# Allegro board MotorControlBoard.brd
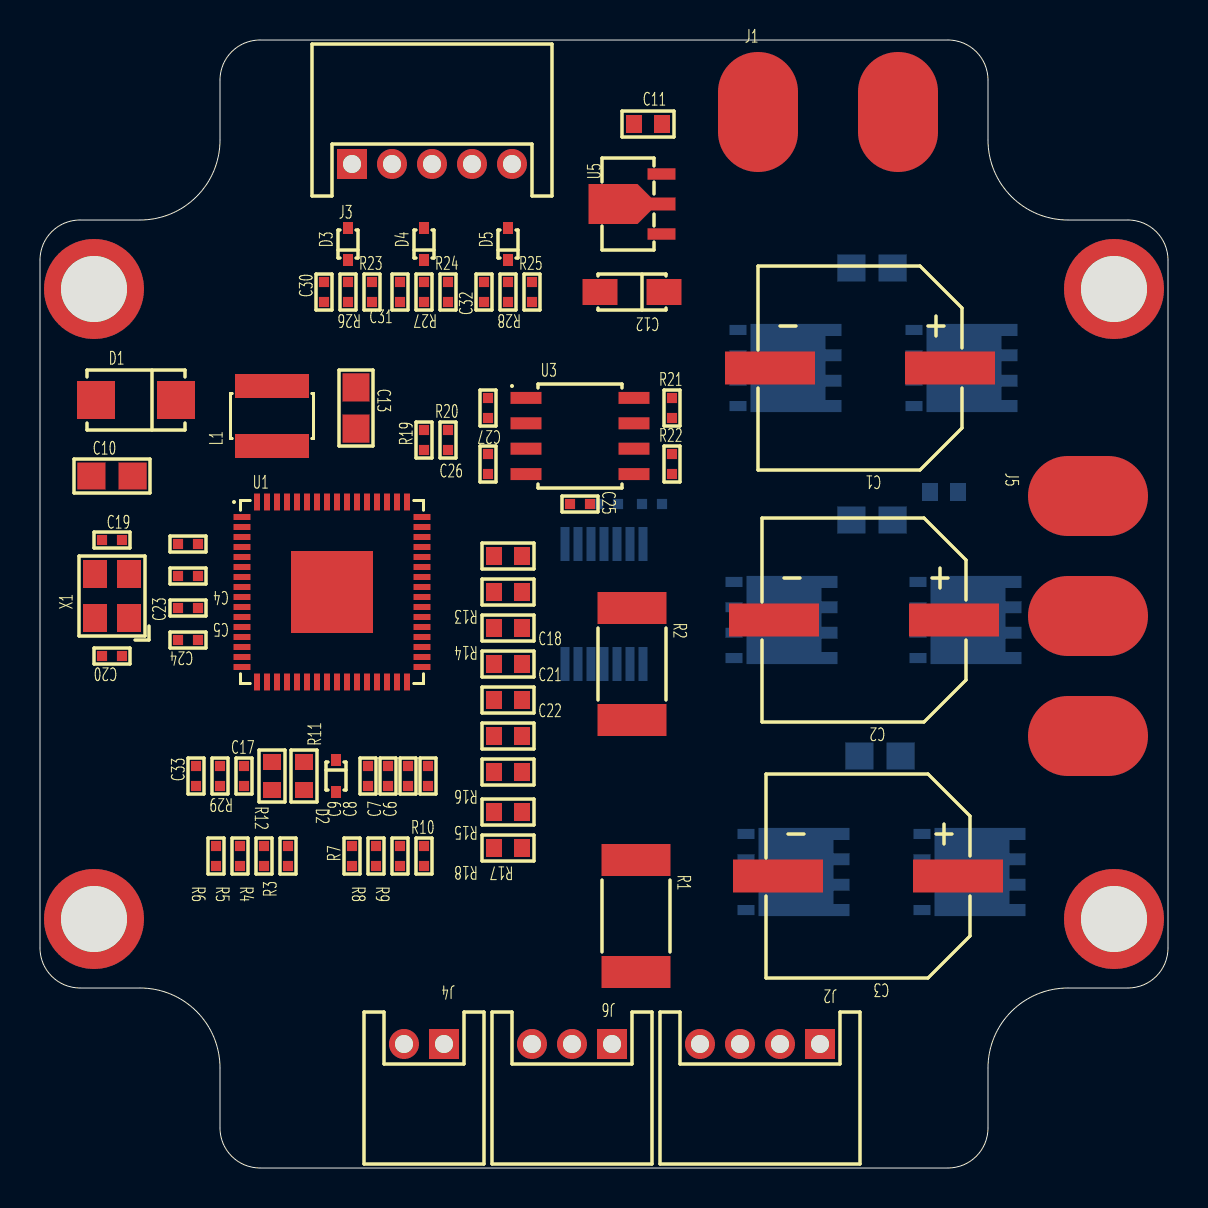
[diagram p0: board, top side]
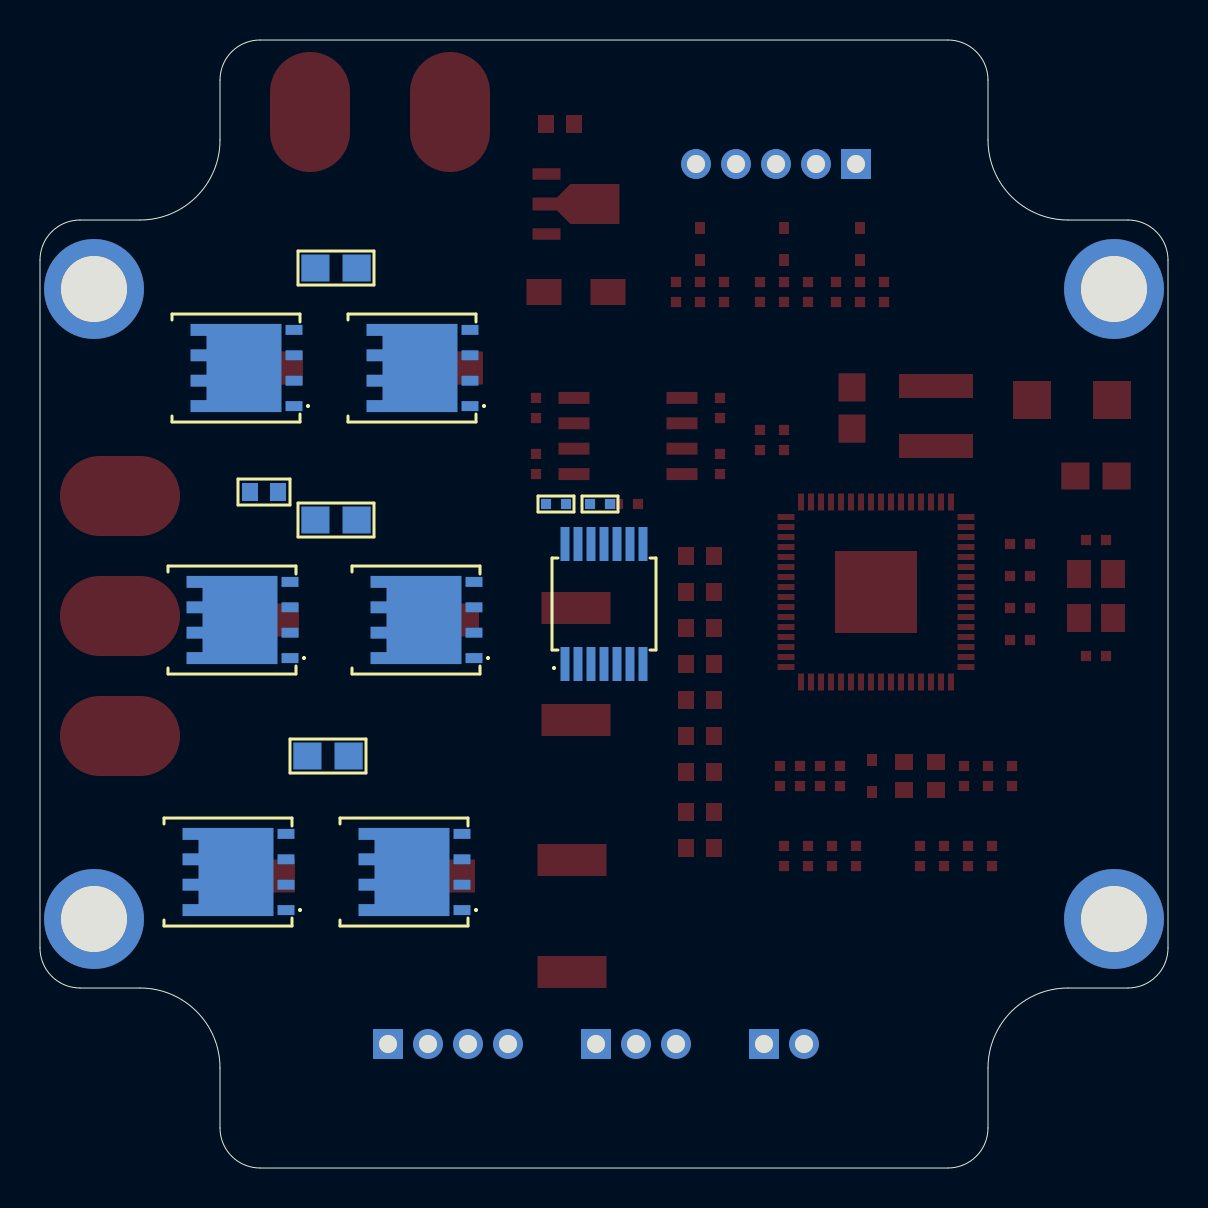
[diagram p1: board, bottom side, seen from below]

Outline 56.4 x 56.4 mm; copper layers: TOP, GND, POWER, BOTTOM. Coordinates in mm from the lower left corner of the outline.
Outline path: 0,45.4 0,11 arc(0.59,9.59) 2,9 5,9 arc(7.83,7.83) 9,5 9,2 arc(9.59,0.59) 11,0 45.4,0 arc(46.81,0.59) 47.4,2 47.4,5 arc(48.57,7.83) 51.4,9 54.4,9 arc(55.81,9.59) 56.4,11 56.4,45.4 arc(55.81,46.81) 54.4,47.4 51.4,47.4 arc(48.57,48.57) 47.4,51.4 47.4,54.4 arc(46.81,55.81) 45.4,56.4 11,56.4 arc(9.59,55.81) 9,54.4 9,51.4 arc(7.83,48.57) 5,47.4 2,47.4 arc(0.59,46.81) 0,45.4

## Design rules (mm)
constraint set DEFAULT: min track width 0.127

## Placement (name value [footprint] x y rotation side)
C1  220uF 100  [C10X10]  41 40 180 top
C2  220uF 100  [C10X10]  41.2 27.4 180 top
C3  220uF 100  [C10X10]  41.4 14.6 180 top
C4  10uF  [C0402]  7.4 31.2 180 top
C5  100nF  [C0402]  7.4 29.6 180 top
C6  100nF  [C0402]  18.4 19.6 90 top
C7  1uF  [C0402]  19.4 19.6 90 top
C8  1uF  [C0402]  16.4 19.6 90 top
C9  100nF  [C0402]  17.4 19.6 90 top
C10  10uF 25V  [C0805]  3.6 34.6 0 top
C11  1uF  [C0603]  30.4 52.2 0 top
C12  10uF  [C3216]  29.6 43.8 180 top
C13  220nF 100V  [C0805]  15.8 38 270 top
C14  220nF 100V  [C0805]  41.6 32.4 180 bottom
C15  220nF 100V  [C0805]  42 20.6 180 bottom
C16  220nF 100V  [C0805]  41.6 45 180 bottom
C17  33nF  [C0402]  10.2 19.6 90 top
C18  1uF 25V  [C0603]  23.4 27 0 top
C19  18pF  [C0402]  3.6 31.4 0 top
C20  18pF  [C0402]  3.6 25.6 180 top
C21  1uF 25V  [C0603]  23.4 25.2 0 top
C22  1uF 25V  [C0603]  23.4 23.4 0 top
C23  100nF  [C0402]  7.4 28 180 top
C24  100nF  [C0402]  7.4 26.4 180 top
C25  47nF  [C0402]  27 33.2 0 top
C26  4.7uF  [C0402]  22.4 35.2 90 top
C27  100nF  [C0402]  22.4 38 270 top
C28  1uF  [C0402]  28.4 33.2 180 bottom
C29  100nF  [C0402]  30.6 33.2 180 bottom
C30  1nF  [C0402]  14.2 43.8 90 top
C31  1nF  [C0402]  18 43.8 90 top
C32  1nF  [C0402]  22.2 43.8 90 top
C33  33nF  [C0402]  7.8 19.6 90 top
D1  DIODE SCHOTTKY  [DO-214AC]  4.8 38.4 0 top
D2  DIODE SCHOTTKY  [SOD-523]  14.8 19.6 270 top
D3  DIODE SCHOTTKY  [SOD-523]  15.4 46.2 90 top
D4  DIODE SCHOTTKY  [SOD-523]  19.2 46.2 90 top
D5  DIODE SCHOTTKY  [SOD-523]  23.4 46.2 90 top
J1  CON2  [TP2-6040]  39.4 52.8 0 top
J2  CON4  [PH4-2]  36 6.2 180 top
J3  CON 5  [PH5-2]  19.6 50.2 0 top
J4  CON2  [PH2-2]  19.2 6.2 180 top
J5  CON3  [TP3-6040]  52.4 27.6 270 top
J6  CON3  [PH3-2]  26.6 6.2 180 top
L1  18uH  [L4030]  11.6 37.6 90 top
NOREF  -  [unnamed]  2.7 43.95 0 top
NOREF#2  -  [unnamed]  53.7 43.95 0 top
NOREF#3  -  [unnamed]  53.7 12.45 0 top
NOREF#4  -  [unnamed]  2.7 12.45 0 top
NTC1  10k  [R0603]  45.2 33.8 180 bottom
Q1  BSC0702LS  [TDSON-8]  46.6 40 90 bottom
Q2  BSC0702LS  [TDSON-8]  37.8 40 90 bottom
Q3  BSC0702LS  [TDSON-8]  46.8 27.4 90 bottom
Q4  BSC0702LS  [TDSON-8]  37.6 27.4 90 bottom
Q5  BSC0702LS  [TDSON-8]  47 14.8 90 bottom
Q6  BSC0702LS  [TDSON-8]  38.2 14.8 90 bottom
R1  0.005  [R2512]  29.8 12.6 270 top
R2  0.005  [R2512]  29.6 25.2 270 top
R3  33k  [R0402]  12.4 15.6 90 top
R4  1K  [R0402]  11.2 15.6 270 top
R5  1K  [R0402]  10 15.6 270 top
R6  16k  [R0402]  8.8 15.6 270 top
R7  33k  [R0402]  15.6 15.6 90 top
R8  1K  [R0402]  16.8 15.6 270 top
R9  1K  [R0402]  18 15.6 270 top
R10  16k  [R0402]  19.2 15.6 90 top
R11  75k  [R0603]  13.2 19.6 90 top
R12  5k  [R0603]  11.6 19.6 270 top
R13  33  [R0603]  23.4 30.6 180 top
R14  33  [R0603]  23.4 28.8 180 top
R15  33  [R0603]  23.4 19.8 180 top
R16  33  [R0603]  23.4 21.6 180 top
R17  33  [R0603]  23.4 16 180 top
R18  33  [R0603]  23.4 17.8 180 top
R19  22k  [R0402]  19.2 36.4 90 top
R20  10k  [R0402]  20.4 36.4 90 top
R21  60  [R0402]  31.6 38 90 top
R22  60  [R0402]  31.6 35.2 90 top
R23  10k  [R0402]  16.6 43.8 90 top
R24  10k  [R0402]  20.4 43.8 90 top
R25  10k  [R0402]  24.6 43.8 90 top
R26  1k8  [R0402]  15.4 43.8 270 top
R27  1k8  [R0402]  19.2 43.8 270 top
R28  1k8  [R0402]  23.4 43.8 270 top
R29  1K  [R0402]  9 19.6 270 top
U1  STSPIN32G4  [VFQFPN-64-9X9]  14.6 28.8 0 top
U3  TJA1040  [SOIC-8]  27 36.6 0 top
U4  AS5047P  [TSSOP-14]  28.2 28.2 180 bottom
U5  L78L  [SOT-89]  29.6 48.2 90 top
X1  24MHz  [SMD3225-4]  3.6 28.6 90 top

## Library data of the parts
C1-C3 C12 = CP
C4-C11 C13-C33 = C
D1-D5 = DIODE SCHOTTKY
J1 J4 = CON2
J2 = CON4
J3 = CON 5
J5 J6 = CON3
L1 = INDUCTOR
NTC1 = NTC
Q1-Q6 = MOS
R1-R29 = R
U1 = STSPIN32G4-AB
U3 = TJA1040
U4 = AS5047P
U5 = L78L
X1 = CRYSTAL-PASSIVE

## Footprints (pads in the part's own frame, mm; a bottom-side part is the same pattern mirrored in y, then rotated)
C10X10
  rect 4.5x1.65 smd: 1(-4.5,0) 2(4.5,0)
C0402
  rect 0.508x0.508 smd: 1(-0.5,0) 2(0.5,0)
C0603
  rect 0.8x0.9 smd: 1(-0.7,0) 2(0.7,0)
C0805
  rect 1.41x1.35 smd: 1(-1.03,0) 2(1.03,0)
C3216
  rect 1.75x1.3 smd: 1(-1.6,0) 2(1.6,0)
DO-214AC
  rect 1.9x1.9 smd: 1(-2,0) 2(2,0)
L4030
  rect 1.2x3.7 smd: 1(-1.5,0) 2(1.5,0)
PH2-2
  rect 1.5x1.5 hole 0.9: 1(-1,0)
  round 1.5 hole 0.9: 2(1,0)
PH3-2
  rect 1.5x1.5 hole 0.9: 1(-2,0)
  round 1.5 hole 0.9: 2(0,0) 3(2,0)
PH4-2
  rect 1.5x1.5 hole 0.9: 1(-3,0)
  round 1.5 hole 0.9: 2(-1,0) 3(1,0) 4(3,0)
PH5-2
  rect 1.5x1.5 hole 0.9: 1(-4,0)
  round 1.5 hole 0.9: 2(-2,0) 3(0,0) 4(2,0) 5(4,0)
R0402
  rect 0.508x0.508 smd: 1(-0.5,0) 2(0.5,0)
R0603
  rect 0.8x0.9 smd: 1(-0.7,0) 2(0.7,0)
R2512
  rect 1.6x3.45 smd: 1(-2.8,0) 2(2.8,0)
SMD3225-4
  rect 1.4x1.2 smd: 1(-1.1,-0.85) 2(1.1,-0.85) 3(1.1,0.85) 4(-1.1,0.85)
SOD-523
  rect 0.6x0.5 smd: 1(-0.8,0) 2(0.8,0)
SOIC-8
  rect 1.55x0.6 smd: 1(-2.7,1.905) 2(-2.7,0.635) 3(-2.7,-0.635) 4(-2.7,-1.905) 5(2.7,-1.905) 6(2.7,-0.635) 7(2.7,0.635) 8(2.7,1.905)
SOT-89
  rect 0.57x1.4 smd: 1(-1.5,-1.475) 3(1.5,-1.475)
  custom 2x4.35 smd: 2(0,0)
TDSON-8
  rect 0.5x0.85 smd: 1(-1.905,-2.9) 2(-0.635,-2.9) 3(0.635,-2.9) 4(1.905,-2.9)
  custom 4.41x4.55 smd: 5(0,0)
TP2-6040
  oval 4x6 smd: 1(-3.5,0) 2(3.5,0)
TP3-6040
  oval 4x6 smd: 1(-6,0) 2(0,0) 3(6,0)
TSSOP-14
  rect 0.45x1.7 smd: 1(-1.95,-3) 2(-1.3,-3) 3(-0.65,-3) 4(0,-3) 5(0.65,-3) 6(1.3,-3) 7(1.95,-3) 8(1.95,3) 9(1.3,3) 10(0.65,3) 11(0,3) 12(-0.65,3) 13(-1.3,3) 14(-1.95,3)
unnamed
  round 5 hole 3.3: (0,0)
VFQFPN-64-9X9
  rect 0.85x0.3 smd: 1(-4.5,3.75) 2(-4.5,3.25) 3(-4.5,2.75) 4(-4.5,2.25) 5(-4.5,1.75) 6(-4.5,1.25) 7(-4.5,0.75) 8(-4.5,0.25) 9(-4.5,-0.25) 10(-4.5,-0.75) 11(-4.5,-1.25) 12(-4.5,-1.75) 13(-4.5,-2.25) 14(-4.5,-2.75) 15(-4.5,-3.25) 16(-4.5,-3.75) 33(4.5,-3.75) 34(4.5,-3.25) 35(4.5,-2.75) 36(4.5,-2.25) 37(4.5,-1.75) 38(4.5,-1.25) 39(4.5,-0.75) 40(4.5,-0.25) 41(4.5,0.25) 42(4.5,0.75) 43(4.5,1.25) 44(4.5,1.75) 45(4.5,2.25) 46(4.5,2.75) 47(4.5,3.25) 48(4.5,3.75)
  rect 0.3x0.85 smd: 17(-3.75,-4.5) 18(-3.25,-4.5) 19(-2.75,-4.5) 20(-2.25,-4.5) 21(-1.75,-4.5) 22(-1.25,-4.5) 23(-0.75,-4.5) 24(-0.25,-4.5) 25(0.25,-4.5) 26(0.75,-4.5) 27(1.25,-4.5) 28(1.75,-4.5) 29(2.25,-4.5) 30(2.75,-4.5) 31(3.25,-4.5) 32(3.75,-4.5) 49(3.75,4.5) 50(3.25,4.5) 51(2.75,4.5) 52(2.25,4.5) 53(1.75,4.5) 54(1.25,4.5) 55(0.75,4.5) 56(0.25,4.5) 57(-0.25,4.5) 58(-0.75,4.5) 59(-1.25,4.5) 60(-1.75,4.5) 61(-2.25,4.5) 62(-2.75,4.5) 63(-3.25,4.5) 64(-3.75,4.5)
  rect 4.1x4.1 smd: 65(0,0)

## Nets
5V: C12.1 C26.2 C27.2 C29.2 J3.4 U3.3(VCC) U4.11 U5.1(OUT)
GND: C1.2 C2.2 C3.2 C4.2 C5.2 C6.1 C7.1 C8.1 C9.1 C10.1 C11.1 C12.2 C13.1 C14.2 C15.2 C16.2 C17.1 C19.2 C20.2 C23.2 C24.2 C25.1 C26.1 C27.1 C28.2 C29.1 C30.1 C31.1 C32.1 C33.1 D1.1 J1.1 J2.4 J3.5 J6.3 Q2.1 Q2.2 Q2.3(S#3) R1.2 R2.2 R5.2 R9.2 R12.2 R20.2 R29.2 U1.32 U1.65(VSS) U3.2 U3.8 U4.5 U4.13 U5.2 X1.2 X1.4
VBUS: C17.2 D2.1 R11.2 R12.1 U1.25
VCC: C10.2 L1.2 U1.63 U1.64
VDD: C4.1 C5.1 C6.2 C7.2 C8.2 C9.2 C23.1 D2.2 D3.2 D4.2 D5.2 NTC1.1 R3.1 R7.1 R19.2 R23.1 R24.1 R25.1 U1.1 U1.2 U1.26 U1.27
CAN_H: J4.1 R21.1 U3.7
CAN_L: J4.2 R22.2 U3.6
CAN_RX: U1.47 U3.4
CAN_TX: U1.48 U3.1
GHS1: Q1.4 R13.1
GHS2: Q3.4 R15.1
GHS3: Q5.4 R17.1
GLS1: Q2.4 R14.1
GLS2: Q4.4 R16.1
GLS3: Q6.4 R18.1
HALL_1: R28.2 U1.57
HALL_2: R27.2 U1.58
HALL_3: R26.2 U1.59
MOT_A: C18.2 J5.1 Q1.1 Q1.2 Q1.3(S#3) Q2.5 U1.42
MOT_B: C21.2 J5.2 Q3.1 Q3.2 Q3.3(S#3) Q4.5 U1.39
MOT_C: C22.2 J5.3 Q5.1 Q5.2 Q5.3(S#3) Q6.5 U1.36
NC1: U1.34
NC2: U1.33
NRST: C24.1 J2.1 U1.8
NTC: C33.2 NTC1.2 R29.1 U1.21
OPN1: R5.1 R6.2 U1.16
OPN2: R9.1 R10.2 U1.22
OPO1: R6.1 U1.15
OPO2: R10.1 U1.19
OPP1: R3.2 R4.1 U1.14
OPP2: R7.2 R8.1 U1.20
OSC_IN: C19.1 U1.6 X1.3
OSC_OUT: C20.1 U1.7 X1.1
SCREF: R19.1 R20.1 U1.52
SENSE_BP: Q4.1 Q4.2 Q4.3(S#3) R2.1 R8.2
SENSE_CP: Q6.1 Q6.2 Q6.3(S#3) R1.1 R4.2
SPI_CLK: U1.54 U4.2
SPI_MISO: U1.55 U4.3
SPI_MOSI: U1.56 U4.4
SPI_NCS: U1.53 U4.1
SWCLK: J2.2 U1.50
SWDIO: J2.3 U1.49
UART_RX: J6.2 U1.46
UART_TX: J6.1 U1.45
VM: C1.1 C2.1 C3.1 C11.2 C13.2 C14.1 C15.1 C16.1 J1.2 Q1.5 Q3.5 Q5.5 R11.1 U1.61 U5.3
N203193: D1.2 L1.1 U1.62
N204011: C25.2 R21.2 R22.1 U3.5
N204087: C28.1 U4.12
N204251: C18.1 U1.41
N204345: R13.2 U1.43
N204441: R14.2 U1.29
N204499: C21.1 U1.38
N204533: R15.2 U1.40
N204571: R16.2 U1.30
N204631: C22.1 U1.35
N204677: R17.2 U1.37
N204741: R18.2 U1.31
N205111: C30.2 D3.1 J3.1 R23.2 R26.1
N205115: C31.2 D4.1 J3.2 R24.2 R27.1
N205119: C32.2 D5.1 J3.3 R25.2 R28.1

Pads without a net: U1 3 4 5 9 10 11 12 13 17 18 23 24 28 44 51 60; U4 6 7 8 9 10 14
